# EAGLE board working (EAGLE 6.6.0)
REV: B
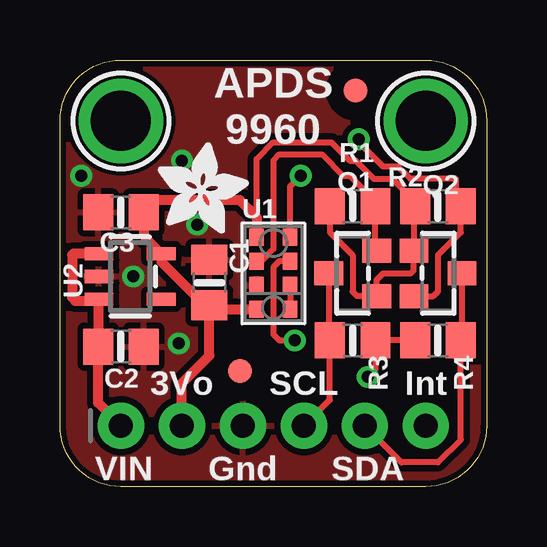
[diagram p0: board, top side]
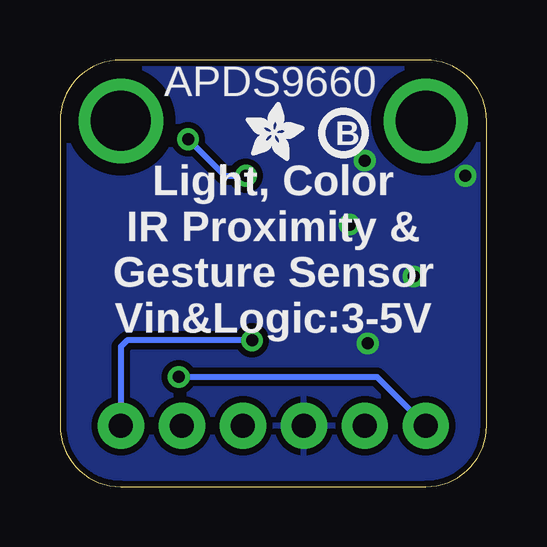
[diagram p1: board, bottom side, seen from below]

Size 17.78 x 17.78 mm. Coordinates in mm from the lower left corner, seen from the top.
Outline: 17.78,15.24 17.78,2.54 arc-90 15.24,0 2.54,0 arc-90 0,2.54 0,15.24 arc-90 2.54,17.78 15.24,17.78 arc-90 17.78,15.24
Copper layers (1*16): Top 0.035mm / dielectric 1.5mm / Bottom 0.035mm
Design rules "adafruit *": minimum track width 8mil, minimum drill 15.5mil, track to track 8mil, track to pad 8mil, pad to pad 8mil, via to via 8mil, smd to smd 8mil, copper to edge 10mil, drill to drill 8mil, minimum pad ring 10mil, minimum via ring 8mil, stop-mask expansion 2mil, vias tented up to drill 20mil, thermal gap 10mil

## Footprints (pad centres in the part's own frame; a part is rotated, then mirrored left to right if it is on the bottom)
0805-NO = smd 1.24 x 1.5: 1 -0.95,0; 2 0.95,0
FIDUCIAL_1MM = smd 1 x 1: 1 0,0
1X06_ROUND_76 = drill 1 pad 1.93: 1 -6.35,0; 2 -3.81,0; 3 -1.27,0; 4 1.27,0; 5 3.81,0; 6 6.35,0
SOT23-WIDE = smd 1 x 1.2: 1 -0.95,-1; 2 0.95,-1; 3 0,1
APDS-9960 = smd 0.6 x 0.72: 1 0.7,1.505; 2 0.7,0.505; 3 0.7,-0.495; 4 0.7,-1.495; 5 -0.7,-1.495; 6 -0.7,-0.495; 7 -0.7,0.505; 8 -0.7,1.505
SOT23-5 = smd 0.55 x 1.2: 1 -0.95,-1.3; 2 0,-1.3; 3 0.95,-1.3; 4 0.95,1.3; 5 -0.95,1.3
MOUNTINGHOLE_2.5_PLATED = drill 2.5 pad 3.2: P$1 0,0

## Placement (x,y rotation side)
C1  0.1uF  [0805-NO]  6.22,8.51 90 top
C2  10uF  [0805-NO]  2.54,5.84 0 top
C3  10uF  [0805-NO]  2.54,11.43 180 top
FID1  FIDUCIAL_1MM  [FIDUCIAL_1MM]  7.49,4.83 0 top
FID2  FIDUCIAL_1MM  [FIDUCIAL_1MM]  12.32,16.51 0 top
JP1  [1X06_ROUND_76]  8.89,2.54 0 top
Q1  BSS138  [SOT23-WIDE]  12.19,8.89 90 top
Q2  BSS138  [SOT23-WIDE]  15.75,8.89 270 top
R1  10K  [0805-NO]  12.19,11.68 180 top
R2  10K  [0805-NO]  15.75,11.68 180 top
R3  10K  [0805-NO]  12.19,6.1 0 top
R4  10K  [0805-NO]  15.75,6.1 180 top
U1  APDS-9960  [APDS-9960]  8.89,8.89 0 top
U2  [SOT23-5]  2.92,8.76 270 top
U$1  MOUNTINGHOLE2.5  [MOUNTINGHOLE_2.5_PLATED]  2.54,15.24 0 top
U$2  MOUNTINGHOLE2.5  [MOUNTINGHOLE_2.5_PLATED]  15.24,15.24 0 top
U$17  [PCBFEAT-REV-040]  5.97,14.73 0 bottom
U$18  [ADAFRUIT_2.5MM]  10.03,13.59 0 bottom
U$19  [ADAFRUIT_3.5MM]  4.06,10.54 0 top

## Library data of the parts
C1-C3 JP1 Q1 Q2 R1-R4 U1 U2 U$17-U$19 = microbuilder
FID1 FID2 U$1 U$2 = microbuilder; BOM: EXCLUDE

## Nets
3.3V: C1.1 C3.1 JP1.2 Q1.1 Q2.1 R1.2 R2.2 U1.5 U1.8 U2.5
GND: C1.2 C2.2 C3.2 JP1.3 U1.6 U2.2
INT: JP1.6 U1.2
N$1: U1.3 U1.4
SCL: JP1.4 Q1.3 R3.1
SCL_3V: Q1.2 R1.1 U1.7
SDA: JP1.5 Q2.3 R4.1
SDA_3V: Q2.2 R2.1 U1.1
VIN: C2.1 JP1.1 R3.2 R4.2 U2.1 U2.3

## Tracks (layer width: path | path; a pad name or v marks a point on that pad's centre or on a via)
3.3V
  Top 0.254: U1.8 8.19,13.65 8.89,14.35 11.3,14.35 12.06,13.59 12.32,13.59 13.08,12.83 13.84,12.83 14.8,11.87 R2.2 14.75,11.63 Q2.1 | 14.73,9.86 Q2.1 | Q2.1 14.73,9.82 14.73,9.02 14.61,8.89 13.46,8.89 13.19,8.62 Q1.1 12.38,7.94 12.19,8.13 12.19,9.65 11.24,10.6 R1.2
  Top 0.406: JP1.2 5.08,4.32 6.22,5.46 C1.1 | C3.1 3.49,10.44 U2.5 4.22,9.37 6.03,7.56 C1.1 | 3.49,11.66 C3.1 | C3.1 4,11.94 7.49,11.94 8.19,11.24 U1.8 | C1.1 6.39,7.39 U1.5
GND  (via drill 0.5)
  other vias: 0.89,12.95 5.08,13.59 4.95,5.97 3.05,8.76 5.71,10.92
  pour Top (isolate 0.254): 0,0 0,15.24 arc-90 2.54,17.78 15.24,17.78 arc-90 17.78,15.24 17.78,0
  pour Bottom (isolate 0.254): 0,0 0,15.24 arc-90 2.54,17.78 15.24,17.78 arc-90 17.78,15.24 17.78,0
INT  (via drill 0.5)
  Top 0.254: U1.2 9.14,9.39 8.89,9.14 8.89,6.35 9.14,6.1 v9.78,6.1
  Bottom 0.254: v9.78,6.1 14.99,6.1 15.24,5.84 JP1.6
N$1
  Top 0.254: U1.3 U1.4
SCL
  Top 0.254: Q1.3 11.19,6.15 R3.1 11.24,3.62 JP1.4
SCL_3V
  Top 0.254: Q1.2 13.21,9.86 13.14,9.92 R1.1 13.21,11.75 13.21,11.81 12.06,12.95 11.81,12.95 10.92,13.84 9.14,13.84 8.89,13.59 8.89,9.91 8.38,9.39 U1.7
SDA
  Top 0.254: Q2.3 16.75,6.15 R4.1 16.7,1.97 15.75,1.02 14.22,1.02 JP1.5
SDA_3V  (via drill 0.5)
  Top 0.254: U1.1 9.59,12.51 v10.03,12.95 | Q2.2 15.56,7.94 15.75,8.13 15.75,9.65 16.7,10.6 R2.1 17.02,11.68 16.51,12.19 16.51,12.83 14.61,12.83 14.1,13.34 13.46,13.34 12.45,14.35 v12.45,14.48
  Bottom 0.254: v12.45,14.48 10.92,12.95 v10.03,12.95
VIN  (via drill 0.5)
  Top 0.254: R4.2 R3.2 13.14,4.89 v12.83,4.57
  Top 0.406: JP1.1 1.59,3.49 C2.1 1.62,5.81 U2.3 1.55,7.75 0.64,7.75 0.51,7.87 0.51,9.65 0.57,9.71 U2.1
  Bottom 0.254: v12.83,4.57 4.57,4.57 JP1.1

## Text on the board
tPlace: APDS / 9960 | 3Vo | SCL | Int | VIN | Gnd | SDA
bPlace: APDS9660 | Light, Color / IR Proximity & / Gesture Sensor / Vin&Logic:3-5V